# EAGLE board safe_pi_shutdown (EAGLE 6.6.0)
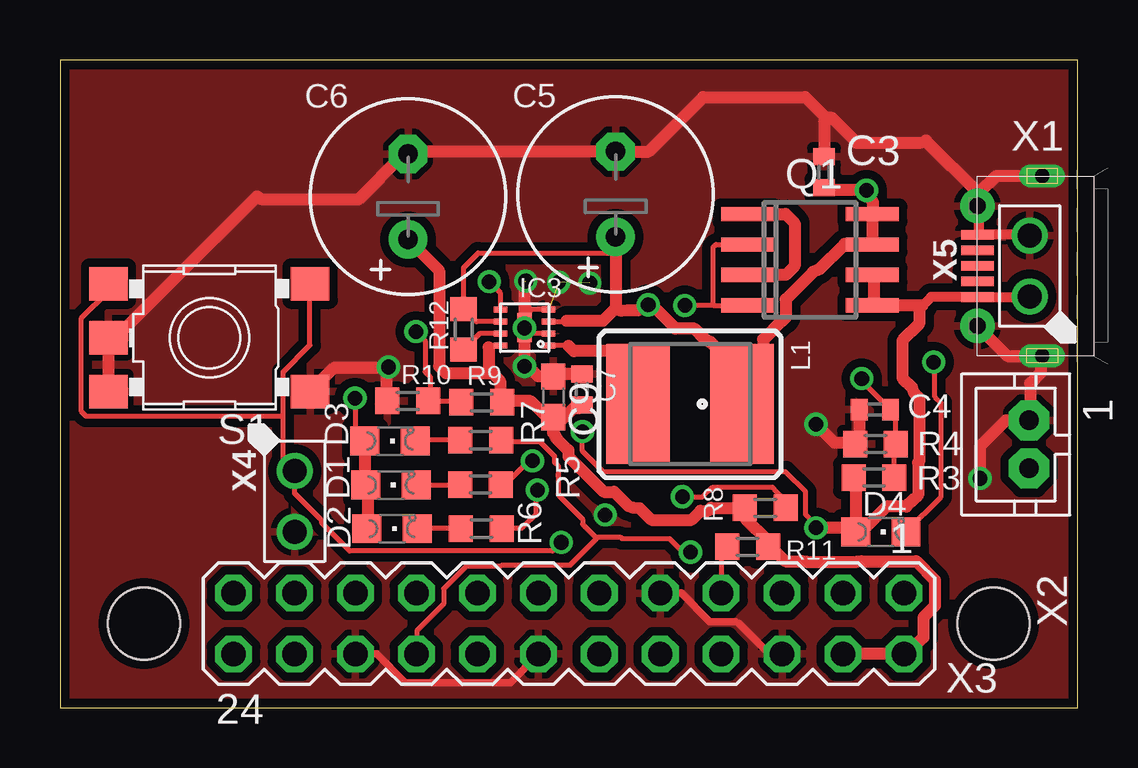
[diagram p0: board, top side]
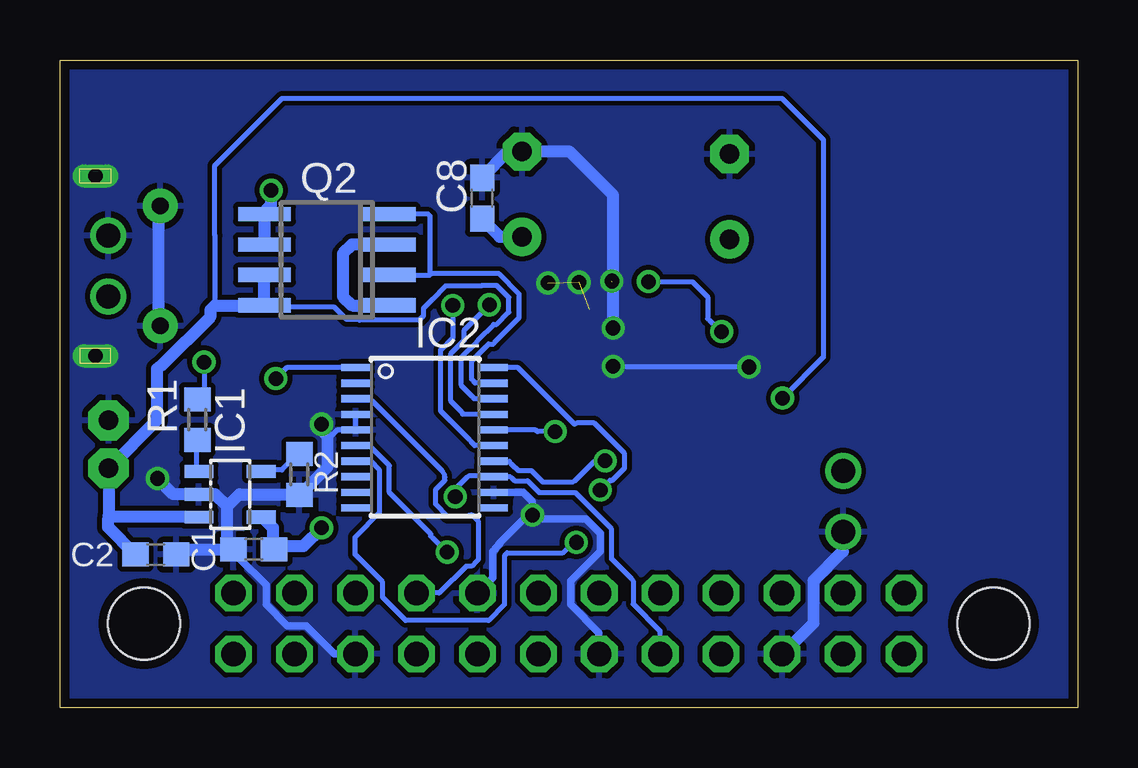
[diagram p1: board, bottom side, seen from below]

Size 42.4 x 27 mm. Coordinates in mm from the lower left corner, seen from the top.
Outline: 0,0 42.4,0 42.4,27 0,27 0,0
Copper layers (1*16): Top 0.0356mm / dielectric 1.5011mm / Bottom 0.0356mm
Design rules "oshpark-2layer": minimum track width 6mil, minimum drill 13mil, track to track 6mil, track to pad 6mil, pad to pad 6mil, via to via 6mil, smd to smd 6mil, copper to edge 15mil, drill to drill 6mil, minimum pad ring 7mil, minimum via ring 7mil, stop-mask expansion 2.5mil, vias tented up to drill 0mil, thermal gap 10mil
Net classes: 0 default: width 0.203 mm, drill 0.61 mm, clearance 0.205 mm; 1 VCC: width 0.508 mm, drill 0.61 mm, clearance 0.205 mm to class 0, clearance 0.205 mm
Holes 3 mm at 3.5,3.5 38.9,3.5

## Footprints (pad centres in the part's own frame; a part is rotated, then mirrored left to right if it is on the bottom)
C0603 = smd 1.1 x 1: 1 -0.85,0; 2 0.85,0
C0402 = smd 0.7 x 0.9: 1 -0.65,0; 2 0.65,0
E3,5-8 = drill 0.813 pad 1.6: + -1.778,0 | drill 0.813 pad 1.6 octagon: - 1.778,0
CHIPLED_0805 = smd 1.2 x 1.2: A 0,-1.05; C 0,1.05
SOT23-5L = smd 0.533 x 1.2: 1 -0.95,-1.3; 2 0,-1.3; 3 0.95,-1.3 | smd 0.55 x 1.2: 4 0.95,1.3; 5 -0.95,1.3
SSOP20 = smd 0.3 x 1.2: 1 -2.9,-2.9; 2 -2.25,-2.9; 3 -1.6,-2.9; 4 -0.95,-2.9; 5 -0.3,-2.9; 6 0.35,-2.9; 7 1,-2.9; 8 1.65,-2.9; 9 2.3,-2.9; 10 2.95,-2.9; 11 2.95,2.85; 12 2.3,2.85; 13 1.65,2.85; 14 1,2.85; 15 0.35,2.85; 16 -0.3,2.85; 17 -0.95,2.85; 18 -1.6,2.85; 19 -2.25,2.85; 20 -2.9,2.85
MIC2876 = smd 0.25 x 0.55: P$1 -0.75,-1; P$2 -0.25,-1; P$3 0.25,-1; P$4 0.75,-1; P$5 0.75,1; P$6 0.25,1; P$7 -0.25,1; P$8 -0.75,1 | smd 1.2 x 0.6: P$9 0,0
CR54-KIT = smd 5 x 2.65: P$1 0,2.17; P$2 0,-2.17
SO8 = smd 0.6 x 2.2: 1 -1.905,-2.6; 2 -0.635,-2.6; 3 0.635,-2.6; 4 1.905,-2.6; 5 1.905,2.6; 6 0.635,2.6; 7 -0.635,2.6; 8 -1.905,2.6
R0603 = smd 1 x 1.1: 1 -0.85,0; 2 0.85,0
SKHMPXE010 = smd 1.6 x 1.4: 1 -4.2,2.25; 2 4.2,2.25; 3 -4.2,-2.25; 4 4.2,-2.25; 5 4.2,0
47589-0001 = smd 1.35 x 0.4: 1 2.7,1.3; 2 2.7,0.65; 3 2.7,0; 4 2.7,-0.65; 5 2.7,-1.3 | drill 0.6 pad 0.95 long: CASING1 0,3.75; CASING2 0,-3.75 | drill 0.7 pad 1.45: CASING3 2.7,2.5; CASING4 2.7,-2.5
JST-PH2 = drill 0.813 pad 1.676 octagon: 1 1,0; 2 -1,0
MA12-2 = drill 1.016 octagon: 1 -13.97,-1.27; 2 -13.97,1.27; 3 -11.43,-1.27; 4 -11.43,1.27; 5 -8.89,-1.27; 6 -8.89,1.27; 7 -6.35,-1.27; 8 -6.35,1.27; 9 -3.81,-1.27; 10 -3.81,1.27; 11 -1.27,-1.27; 12 -1.27,1.27; 13 1.27,-1.27; 14 1.27,1.27; 15 3.81,-1.27; 16 3.81,1.27; 17 6.35,-1.27; 18 6.35,1.27; 19 8.89,-1.27; 20 8.89,1.27; 21 11.43,-1.27; 22 11.43,1.27; 23 13.97,-1.27; 24 13.97,1.27
PTH_2.54MM_01X02 = drill 1: P$1 -1.27,0; P$2 1.27,0

## Placement (x,y rotation side)
C1  10u  [C0603]  34.33,6.6 180 bottom
C2  10u  [C0603]  38.4,6.38 0 bottom
C3  100n  [C0402]  31.83,22.32 270 top
C4  100n  [C0402]  33.95,12.43 0 top
C5  220u  [E3,5-8]  23.15,21.4 90 top
C6  220u  [E3,5-8]  14.5,21.3 90 top
C7  100n  [C0402]  21.74,13.26 90 top
C8  22u  [C0603]  24.82,21.23 90 bottom
C9  22u  [C0603]  20.55,12.95 270 top
D1  [CHIPLED_0805]  13.79,9.28 270 top
D2  [CHIPLED_0805]  13.84,7.46 270 top
D3  [CHIPLED_0805]  13.75,11.11 270 top
D4  [CHIPLED_0805]  34.2,7.32 270 top
IC1  MCP73831  [SOT23-5L]  35.31,8.89 270 bottom
IC2  LTC2952CF  [SSOP20]  27.18,11.27 270 bottom
IC3  MIC2876  [MIC2876]  19.36,15.84 90 top
L1  1u  [CR54-KIT]  26.25,12.65 270 top
Q1  IRF7342  [SO8]  31.25,18.67 270 top
Q2  IRF7342  [SO8]  31.28,18.67 90 bottom
R1  1k  [R0603]  36.68,12 90 bottom
R2  10k  [R0603]  32.42,9.72 270 bottom
R3  820k  [R0603]  33.91,9.59 180 top
R4  100k  [R0603]  33.98,10.99 0 top
R5  1k  [R0603]  17.52,9.3 180 top
R6  1k  [R0603]  17.56,7.46 180 top
R7  1k  [R0603]  17.53,11.14 180 top
R8  10k  [R0603]  29.39,8.33 0 top
R9  910k  [R0603]  17.58,12.73 180 top
R10  120k  [R0603]  14.49,12.78 180 top
R11  10k  [R0603]  28.65,6.71 0 top
R12  910k  [R0603]  16.81,15.77 270 top
S1  SKHMPSE010  [SKHMPXE010]  6.22,15.42 180 top
X1  MICRO-USB-RECEPTACLE47589-0001  [47589-0001]  40.93,18.41 180 top
X2  [JST-PH2]  40.37,10.97 90 top
X3  [MA12-2]  21.2,3.5 180 top
X4  MF-CON-2.54mm-01x02  [PTH_2.54MM_01X02]  9.78,8.6 270 top
X5  MF-CON-2.54mm-01x02  [PTH_2.54MM_01X02]  40.4,18.41 90 top

## Library data of the parts
C1-C9 R1-R12 = rcl
D1-D4 = led
IC1 = mcp73831
IC2 = ltc2952
IC3 = mic2876
L1 = SparkFun-Passives
Q1 Q2 = zetex; OC_FARNELL: unknown; OC_NEWARK: unknown
S1 = switch
X1 = con-molex-usb
X2 = jst-ph
X3 = con-lstb; OC_FARNELL: unknown; OC_NEWARK: unknown
X4 X5 = MF_Connectors; HOUSEPART: YES; MPN: MF-CON-2.54mm-01x02; POPULATE: 1; URL: https://factory.macrofab.com/part/MF-CON-2.54mm-01x02

## Nets
GND [VCC]: C1.2 C2.2 C3.1 C4.1 C5.- C6.- C7.2 C8.2 C9.1 IC1.2 IC2.4 IC2.5 IC2.12 IC3.P$2 IC3.P$4 R2.2 R4.1 R10.2 S1.1 S1.2 S1.5 X1.5 X1.CASING1 X1.CASING2 X1.CASING3 X1.CASING4 X2.1 X3.6 X3.9 X3.14 X3.20 X4.P$2 X5.P$2
N$1 [VCC]: Q2.1 Q2.3
N$2: IC2.19 Q2.2 Q2.4
N$3: IC2.15 Q1.2 Q1.4
N$4 [VCC]: C6.+ C7.1 C9.2 IC3.P$8 R8.1 R9.1 R11.2 X3.2 X3.4
N$5: IC2.7 S1.3 S1.4 X4.P$1
N$6: D4.C R1.2
N$7: IC3.P$5 R9.2 R10.1
N$8: C4.2 IC2.1 R3.1 R4.2
N$9: IC3.P$1 L1.P$2
N$10: IC2.13 R8.2 X3.16
N$11: IC3.P$7 R12.2
N$12: IC2.3 R11.1 X3.7
N$14: IC1.5 R2.1
N$15: D3.C R7.2
N$16: D1.C R5.2
N$17: IC2.14 R5.1
N$18: IC2.6 R7.1 X3.18
N$19: IC2.20 R6.1
N$20: D2.C R6.2
N$23: IC1.1 R1.1
N$34 [VCC]: Q1.1 Q1.3
V1 [VCC]: C2.1 D1.A D2.A D3.A IC1.3 IC2.18 Q2.7 Q2.8 X2.2
V2 [VCC]: C1.1 D4.A IC1.4 IC2.16 Q1.5 Q1.6 R3.2 X1.1 X5.P$1
VCC [VCC]: C3.2 C5.+ C8.1 IC2.17 IC3.P$3 IC3.P$6 L1.P$1 Q1.7 Q1.8 Q2.5 Q2.6 R12.1

## Tracks (layer width: path | path; a pad name or v marks a point on that pad's centre or on a via)
GND  (via drill 0.61)  (3 unrouted)
  Top 0.203: IC3.P$2 19.36,15.59 19.36,15.6 v19.36,15.82 19.36,16.48 | 19.36,14.23 v19.36,14.22 | v13.69,14.2 13.69,14.13 | IC3.P$4 19.46,16.59
  Top 0.305: 30.11,2.23 X3.6 29.93,2.23 29.55,2.23 28.28,3.5 28.15,3.58 27.08,3.58 25.89,4.78 25.02,4.78 X3.9 | X3.20 12.48,2.23 13.19,2.23 14.38,1.04 18.75,1.04 19.92,2.21 X3.14
  Top 0.406: 40.38,19.7 X5.P$2 40.19,19.71 X1.5 38.28,19.77 38.28,20.89
  Top 0.508: C4.1 33.3,11.16 R4.1 32.9,11.05 32.26,11.05 v31.5,11.81 | 38.28,21.44 38.28,20.89 38.25,20.89 X1.CASING4 | X1.CASING2 39.01,22.16 38.28,21.44 | X1.CASING3 39.48,14.66 X1.CASING1 40.88,14.61 40.88,13.97 40.42,13.51 40.42,12.02 X2.1 39.41,11.97 38.34,10.9 v38.34,9.55 | 38.28,21.44 36.08,23.64 35.84,23.55 33.2,23.55 32.16,24.59 31.9,24.6 | 31.9,24.6 31.05,25.45 26.8,25.45 24.53,23.18 C5.- 23.14,23.19 14.86,23.19 14.63,23.09 C6.- 14.25,23.01 12.42,21.18 8.43,21.18 8.2,21.31 2.29,15.39 S1.5 2.01,15.42 2.01,13.18 S1.2 | S1.1 10.44,13.18 11.43,14.17 13.61,14.17 v13.69,14.2 13.61,13.92 13.61,12.8 R10.2 | 19.36,14.23 19.36,15.82 v19.36,15.82 | C3.1 31.85,22.99 31.85,24.36 31.9,24.6 | 19.36,16.48 19.36,16.56 | 19.36,16.56 19.36,17.7 19.38,17.73 | 19.46,16.59 19.38,16.59 19.36,16.56 | v19.36,14.22 19.61,14.12 19.91,13.82 20.55,13.82 C9.1 20.78,13.92 C7.2
  Bottom 0.203: IC2.4 IC2.5 30.85,11.57 31.25,11.18 | 23.14,23.19 C5.- | v19.36,14.22 13.72,14.22 v13.69,14.2
  Bottom 0.305: 35.06,6.35 35.06,6.48 C1.2 34.96,6.25 33.81,5.11 33.81,4.29 32.92,3.4 32.14,3.4 30.97,2.23 30.11,2.23 X3.6 | IC2.12 23.1,8.97 22.71,8.59 v22.71,8.03 | v22.71,8.03 22.59,7.95 22.51,7.87 20.5,7.87 19.89,7.26 19.89,6.5 21.11,5.28 21.11,4.29 19.95,3.12 19.95,2.23 X3.14 | v22.71,8.03 22.92,8.03 24.09,6.86 24.09,6.83 24.14,6.78 24.14,6.76 24.26,6.63 24.26,6.6 24.36,6.5 24.36,5.41 X3.9
  Bottom 0.508: 35.44,8.38 35.95,8.89 IC1.2 37.67,8.89 v38.34,9.55 | 35.44,8.38 35.44,6.86 35.31,6.73 C1.2 | C1.2 | 35.44,8.38 34.93,8.89 32.52,8.89 R2.2 32.26,9.02 31.25,10.03 31.25,11.18 31.25,11.3 31.5,11.56 v31.5,11.81 | X1.CASING3 38.28,15.97 38.28,20.86 X1.CASING4 | C2.2 37.33,6.6 C1.2 | X4.P$2 9.78,7.32 9.78,6.5 11,5.28 11,3.53 12.29,2.23 X3.20 | 23.14,23.19 21.18,23.19 19.36,21.36 v19.36,15.82 | C5.- 23.37,23.19 23.72,23.19 24.82,22.1 C8.2
  other vias: 19.41,17.78 20.78,17.73 22.07,17.7
  pour Top (isolate 0.356, rank 2): 0,0 0,27 42.4,27 42.4,0
  pour Bottom: 42.4,0 0,0 0,27 42.4,27
N$1
  Bottom 0.508: Q2.3 30.23,19.3 30.61,18.92 30.61,17.14 30.23,16.76 Q2.1
N$2
  Bottom 0.203: IC2.19 25.1,13.52 25.15,13.56 25.2,13.64 25.25,13.69 25.25,14.45 24.54,15.16 24.33,15.16 24.28,15.24 23.27,16.26 23.27,17.25 24.11,18.09 26.92,18.09 26.98,18.03 | Q2.2 26.98,18.03 | 26.98,18.03 26.98,20.5 27.05,20.55 27.08,20.57 Q2.4
N$3  (via drill 0.61)
  Top 0.203: 27.23,16.76 Q1.4 | 27.23,16.76 27.23,19.23 27.3,19.28 27.33,19.3 Q1.2 | 27.23,16.76 v26.04,16.76
  Bottom 0.203: IC2.15 25.12,10.92 25.27,11.07 25.32,11.15 26.54,12.37 26.54,14.91 26.04,15.42 v26.04,16.76
N$4
  Top 0.203: IC3.P$8 17.93,15.09 17.86,15.01
  Top 0.508: X3.4 X3.2 35.28,2.23 35.97,2.92 35.97,3.76 36.45,4.24 36.45,5.31 35.67,6.1 33.4,6.1 33.17,6.07 31.14,6.07 30.91,6.1 30.23,6.1 29.74,6.58 R11.2 29.46,6.96 28.57,7.85 28.57,8.08 R8.1 | 28.52,8.33 R8.1 | R8.1 28.27,8.33 27.13,8.33 27,8.2 26.7,8.2 26.31,7.82 24.64,7.82 24.16,8.31 23.9,8.33 23.67,8.41 23.09,8.99 22.66,8.99 21.18,10.46 21.18,10.72 20.7,11.2 20.57,11.43 20.55,11.46 C9.2 | 18.39,12.98 R9.1 | 18.01,13.95 16.08,13.95 15.8,14.22 15.8,18.21 14.5,19.51 C6.+ | 18.01,13.95 18.34,13.61 18.34,12.81 R9.1 | 17.86,15.01 17.86,14.1 18.01,13.95 | C9.2 20.78,11.86 21.39,12.47 21.61,12.47 21.74,12.6 C7.1 | R9.1 18.67,12.78 19.61,12.78 20.3,12.09 C9.2
N$5  (via drill 0.61)
  Top 0.203: v20.89,6.88 20.53,6.53 12.07,6.53 12,6.6 10.9,7.7 10.9,7.8 9.78,8.93 X4.P$1 9.73,9.96 9.3,10.39 9.3,12.14 | 9.3,12.14 9.3,13.99 10.41,15.11 10.41,17.65 S1.3 | 9.3,12.14 1.09,12.14 0.89,12.34 0.89,16.23 2.01,17.35 2.01,17.65 S1.4
  Bottom 0.203: IC2.7 29.45,10.27 29.09,9.91 29.09,8.13 30.11,7.11 30.11,6.38 28.96,5.23 28.96,4.6 28,3.63 24.54,3.63 23.88,4.29 23.88,6.33 23.83,6.38 23.78,6.45 21.44,6.45 20.96,6.93 v20.89,6.88
N$6  (via drill 0.61)
  Top 0.203: v36.4,14.4 36.45,14.35 36.45,12.95 36.71,12.7 36.71,8.79 35.26,7.34 D4.C
  Bottom 0.203: 36.56,12.85 R1.2 36.4,13.13 v36.4,14.4
N$7  (via drill 0.61)
  Top 0.203: R10.1 16.67,12.78 R9.2 | IC3.P$5 18.36,17.28 v17.88,17.75 | 15.42,12.86 R10.1 | v14.83,15.67 15.21,15.29 15.21,13.99 15.42,13.79 15.42,12.95 R10.1
  Bottom 0.203: v17.88,17.75 16.05,17.75 15.42,17.12 15.42,16.2 15.34,16.15 14.94,15.75 14.83,15.75 | 14.83,15.75 14.58,15.75 | v14.83,15.67 14.83,15.75
N$8  (via drill 0.61)
  Top 0.203: R3.1 34.77,10.92 R4.2 34.83,12.2 C4.2 33.41,13.62 v33.41,13.72
  Bottom 0.203: IC2.1 32.95,14.17 v33.41,13.72
N$9
  Top 0.203: 21.18,15.09 IC3.P$1
  Top 0.508: L1.P$2 24.08,13.92 23.34,14.66 23.34,14.78 23.42,14.86 21.41,14.86 21.18,15.09
N$10  (via drill 0.61)
  Top 0.203: v25.93,8.79 26.77,8.79 26.98,8.99 27.05,9.04 27.2,9.2 29.69,9.2 29.74,9.12 30.25,8.61 30.25,8.33 R8.2
  Bottom 0.203: 24.31,9.6 IC2.13 | IC2.13 24.21,9.6 24.19,9.63 23.65,9.63 23.58,9.58 23.45,9.45 22.92,9.45 22.43,8.97 20.94,8.97 19.41,7.44 19.41,6.2 18.57,5.36 18.52,5.28 18.52,4.32 17.41,3.2 17.41,2.23 X3.16 | 24.43,9.65 IC2.13 | IC2.13 24.54,9.65 25.38,9.65 25.45,9.6 25.93,9.12 v25.93,8.79
N$11
  Top 0.203: IC3.P$7 17.48,15.59 R12.2
N$12
  Top 0.203: X3.7 27.56,6.48 27.79,6.71 R11.1
  Bottom 0.203: IC2.3 29.98,12.83 29.47,12.83 29.39,12.78 26.47,9.86 26.42,9.78 26.37,9.7 26.36,9.6 26.36,9.47 26.75,9.09 26.75,8.48 26.24,7.98 25.4,7.98 25.35,8.03 25.25,8.05 24.97,7.77 24.97,6.15 25.05,6.1 25.25,5.89 25.48,5.89 26.6,4.78 X3.7
N$14
  Bottom 0.203: IC1.5 33.91,9.91 33.15,9.91 32.52,10.54 R2.1
N$15
  Top 0.203: R7.2 16.64,11.18 14.87,11.18 D3.C
N$16
  Top 0.203: R5.2 16.64,9.27 14.87,9.27 D1.C
N$17  (via drill 0.61)
  Top 0.203: 18.42,9.27 R5.1 | 18.49,9.35 R5.1 | v19.68,10.29 19.53,10.29 18.59,9.35 R5.1
  Bottom 0.203: IC2.14 24.31,10.26 23.68,10.26 23.63,10.19 23.45,10.01 23.43,10.01 23.3,9.88 22.76,9.88 22.28,9.4 21.04,9.4 20.95,9.45 20.12,10.29 v19.68,10.29
N$18  (via drill 0.61)
  Top 0.203: 18.4,11.12 R7.1 18.49,11.1 19.99,11.1 20.6,10.49 20.6,10.24 20.75,10.08 20.75,9.73 20.76,9.65 20.76,8.89 20.81,8.81 21.77,7.85 21.77,7.64 22.33,7.09 | 22.33,7.09 23.37,7.09 23.43,7.04 25.41,7.04 25.96,6.48 v26.27,6.48 | 22.33,7.09 22.33,7.01 21.27,5.94 18.42,5.94 18.34,5.89 16.92,5.89 15.98,4.95 15.98,4.32 14.87,3.2 14.87,2.23 X3.18
  Bottom 0.203: IC2.6 29.47,10.92 29.44,10.85 28.68,10.08 28.68,8.97 26.95,7.24 26.95,7.14 26.88,7.09 v26.27,6.48
N$19  (via drill 0.61)
  Top 0.203: R6.1 18.44,7.49 19.28,7.49 19.33,7.57 19.84,8.08 19.84,8.99 v19.89,9.07
  Bottom 0.203: IC2.20 23.32,14.17 20.95,11.81 20.88,11.86 20.14,11.86 18.87,10.59 18.87,9.98 19.38,9.47 19.48,9.47 v19.89,9.07
N$20
  Top 0.203: R6.2 16.64,7.49 14.99,7.49 D2.C
N$23
  Bottom 0.203: R1.1 36.71,11.05 36.71,9.91 IC1.1
N$34
  Top 0.508: Q1.1 30.23,20.57 30.61,20.19 30.61,18.41 30.23,18.03 Q1.3
V1  (via drill 0.61)
  Top 0.203: v12.29,12.9 12.29,11.52 D3.A
  Top 0.508: D3.A 12.71,11.05 12.71,9.4 D1.A 12.71,9.02 12.83,8.89 12.83,7.49 D2.A
  Bottom 0.203: 33.66,16.64 Q2.8 33.58,16.69 30.96,16.69 30.45,16.18 29.95,16.18 29.92,16.15 27.43,16.15 27.25,16.33 27.25,16.64 26.95,16.94 26.9,17.02 26.34,17.58 24.84,17.58 24.82,17.6 24.21,17.6 23.7,17.09 23.7,16.48 24.21,15.98 24.33,15.98 24.97,15.34 25.02,15.27 25.68,14.61 25.68,13.44 25.2,12.95 25.15,12.88 25.14,12.87 IC2.18 | 35.95,19.68 35.94,19.68 | 35.95,19.68 35.95,22.6 33.15,25.4 12.32,25.4 10.59,23.67 10.59,14.61 v12.29,12.9 | 35.95,19.68 35.95,16.76
  Bottom 0.508: Q2.7 Q2.8 35.95,16.76 36.12,16.59 36.12,16.31 38.16,14.28 38.36,14.12 38.36,11.99 X2.2 40.38,8.01 40.31,7.94 | C2.1 40.4,7.52 40.4,7.85 40.31,7.94 | IC1.3 40.31,7.94
V2  (via drill 0.61)
  Top 0.203: 33,9.65 R3.2 | v21.77,11.51 21.77,10.69 22.63,9.83 30.23,9.83 31.06,8.99 31.06,8.05 31.39,7.72 v31.5,7.49
  Top 0.406: 35.95,16.76 36.3,17.11 X1.1 40.37,17.11 X5.P$1 40.35,17.1
  Top 0.508: Q1.6 33.91,18.03 33.91,16.76 Q1.5 35.8,16.76 | 35.95,16.76 35.8,16.76 | 35.8,16.76 35.8,16 35.1,15.3 35.1,13.75 35.5,13.35 35.6,13.1 35.8,12.9 35.8,10.25 35.75,10.2 35.75,8.85 35.57,8.69 35.26,8.38 34.45,8.38 33.41,7.34 D4.A | D4.A 33.15,7.34 33.15,9.45 33.1,9.5 R3.2 | v31.5,7.49 32.82,7.49 32.9,7.42 D4.A
  Bottom 0.203: v21.77,11.51 22.5,11.51 22.57,11.57 IC2.16
  Bottom 0.508: IC1.4 33.91,7.87 33.53,7.49 33.53,6.6 C1.1 33.35,6.73 32.26,6.73 v31.5,7.49
VCC  (via drill 0.61)
  Top 0.203: IC3.P$3 21.07,16.09 21.11,16.13 | IC3.P$6 17.35,16.09 R12.1 16.82,18.34 17.42,18.95 22.99,18.95 23.16,19.13 | v24.51,16.79 24.51,16.66 | 23.42,16.51 23.39,16.54
  Top 0.508: 33.85,19.34 Q1.8 33.86,20.8 33.86,21.11 33.6,21.36 | 33.85,19.34 Q2.6 | 33.85,19.34 34.33,19.34 | 33.85,19.34 Q1.7 33.6,19.33 32.69,19.33 31.62,18.26 31.38,18.16 30.23,17.02 30.23,16.26 30.11,16.13 30.08,16.13 29.3,15.35 29.3,13.53 L1.P$1 28.88,13.46 27.1,15.24 26.87,15.37 26.44,15.8 25.65,15.8 24.84,16.61 24.59,16.61 v24.51,16.79 24.26,16.74 24.08,16.56 23.65,16.56 23.39,16.54 23.16,16.66 | 23.16,16.66 23.16,19.13 23.16,19.61 C5.+ | 21.11,16.13 22.63,16.13 23.16,16.66 | C3.2 31.85,21.67 31.93,21.59 33.48,21.59 33.6,21.36 | v33.6,21.57 33.6,21.36
  Bottom 0.203: IC2.17 25.63,12.22 25.65,12.32 26.11,12.78 26.11,14.76 25.55,15.32 25.55,15.75 v24.51,16.79
  Bottom 0.508: Q2.6 Q2.5 33.76,20.8 33.6,20.95 v33.6,21.57 | C5.+ 23.16,19.63 24.08,19.63 C8.1